# Altium PCB FlightController_Top_6x6.PcbDoc (part 3 of 6)
Units mm, origin at the board's own origin, x right, y up, seen from the top; angles counter-clockwise.
Board outline 149.8 x 149.8 mm, 2 copper layers (Top Layer, Bottom Layer); 156 components, 166 nets, 860 pads, 423 vias.
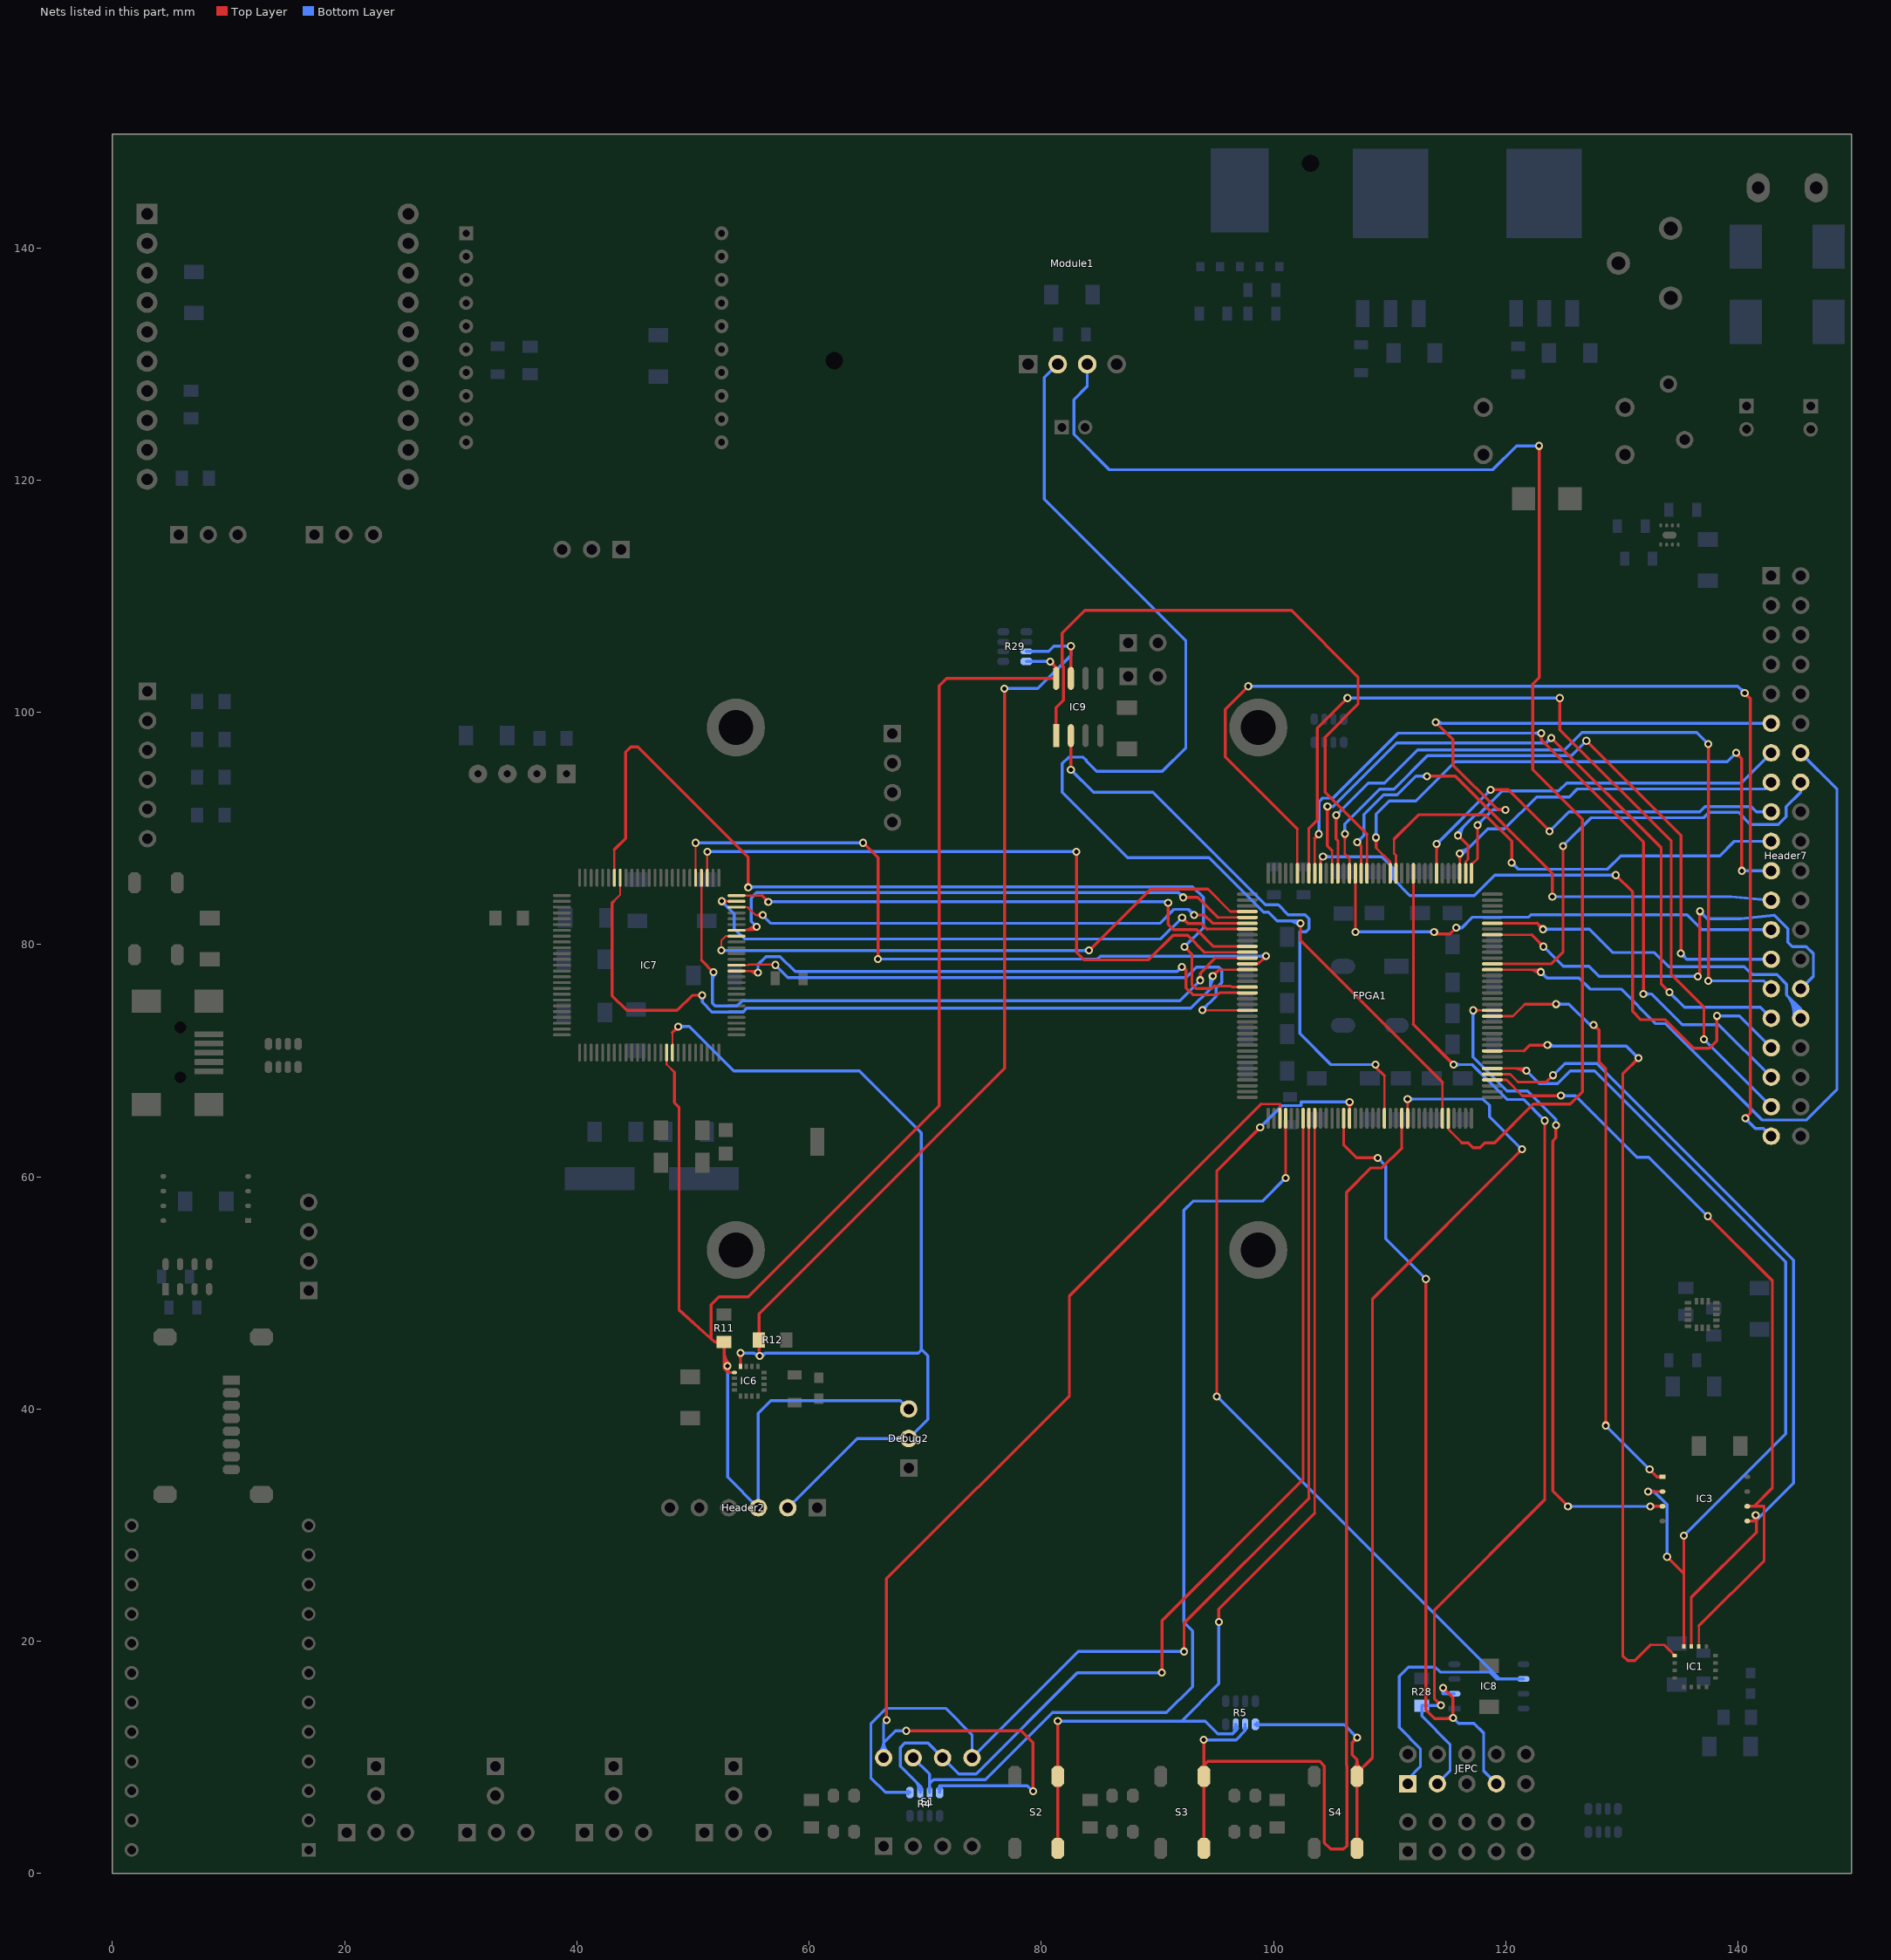
[diagram p3: the nets of this part, all layers, seen from the top]

## Via types
v1: diameter 0.686, hole 0.381, Top Layer to Bottom Layer, 391 vias
v2: diameter 1.27, hole 0.711, Top Layer to Bottom Layer, 32 vias

## Nets (pads, with @x,y where several pads share a name; then routed paths per layer and width w, separated by ;. In a path a pad name is that pad's centre, name@x,y a point inside that pad or via, vN(x,y) a via of type N, cw(c..) or ccw(c..) an arc to the next point about the centre after c; other vN are vias at no path point) (continued)
BLED_ORANGE3: FPGA1.65 Header7.30 | length 42.1
  Top Layer w0.21: FPGA1.65@118.852,80.844 122.245,80.844
  Top Layer w0.254: 122.245,80.844 v1(123.262,79.828) ; v1@123.046,79.828 ccw(c122.524,79.828) 122.893,80.196 ccw(c123.262,80.565) v1@123.262,80.044 ; v1(136.546,77.262) 136.724,77.44 v1(136.724,82.876)
  Bottom Layer w0.254: v1(123.262,79.828) 124.951,78.139 127.173,78.139 128.05,77.262 v1(136.546,77.262) ; v1@136.724,82.66 cw(c136.724,82.138) 137.092,82.507 cw(c137.461,82.876) v1@136.94,82.876 ; v1(136.724,82.876) 137.359,82.241 140.254,82.241 143.15,82.545 144.318,81.377 144.318,80.209 144.699,79.828 145.893,79.828 146.503,79.218 146.503,77.288 Header7.30@145.415,76.2
BLED_ORANGE4: FPGA1.67 Header7.32 | length 39.4
  Top Layer w0.21: FPGA1.67@118.852,81.844 122.693,81.844
  Top Layer w0.254: 122.693,81.844 v1(123.211,81.326) ; v1@122.995,81.326 ccw(c122.473,81.326) 122.842,81.695 ccw(c123.211,82.064) v1@123.211,81.542
  Bottom Layer w0.254: v1(123.211,81.326) 127.228,81.326 129.235,79.32 132.812,79.32 134.036,78.096 140.564,78.096 141.245,77.415 143.353,77.415 144.188,76.58 144.188,75.676 ; v1@123.364,81.173 cw(c123.732,80.805) 123.732,81.326 cw(c123.732,81.848) v1@123.364,81.479 ; 144.537,75.327 cw(c143.234,74.024) Header7.32@145.051,73.721 ; Header7.32@144.801,73.763 ccw(c142.636,74.124) 144.188,75.676 ; 144.886,74.978 cw(c143.832,73.925) Header7.32@145.302,73.679 ; 145.234,74.629 cw(c144.43,73.825) Header7.32@145.552,73.637 ; Header7.32@145.271,74.266 ccw(c145.227,74.449) 145.415,74.449 ; Header7.32@145.415,73.66 145.415,74.449 ; Header7.32@145.559,74.266 cw(c145.603,74.449) 145.415,74.449 ; 144.188,75.676 145.415,74.449
BULTRASONIC_EDGE: FPGA1.60 Header7.16 | length 40.3
  Top Layer w0.21: FPGA1.60@118.852,78.344 120.188,78.344 120.199,78.354 123.947,78.354
  Top Layer w0.254: 123.947,78.354 124.938,79.345 v1(124.938,88.489)
  Bottom Layer w0.254: v1(124.938,88.489) 127.376,90.927 137.063,90.927 137.524,91.388 140.048,91.388 141.092,90.343 143.48,90.343 144.166,91.029 144.166,91.888 145.415,93.137 Header7.16@145.415,93.98
BULTRASONIC_TRIGGER: FPGA1.59 Header7.14 | length 68.8
  Top Layer w0.21: FPGA1.59@118.852,77.844 v1@122.83,77.844 ; 121.975,77.844 cw(c121.975,76.592) v1@122.86,77.477 ; 122.482,77.844 cw(c122.482,77.099) v1@123.008,77.626
  Top Layer w0.254: v1@122.83,77.844 v1(123.028,77.646)
  Bottom Layer w0.254: v1@123.028,77.43 cw(c123.028,76.908) 123.397,77.277 cw(c123.766,77.646) v1@123.244,77.646 ; v1(123.028,77.646) 123.551,77.123 126.319,77.123 127.271,76.17 129.942,76.17 132.915,73.196 133.804,73.196 142.108,64.892 145.893,64.892 148.535,67.534 148.535,93.4 Header7.14@145.415,96.52
CAMERA_DCLK: FPGA1.92 Header7.23 | length 49.8
  Top Layer w0.21: FPGA1.92@107.552,86.144 107.552,88.476
  Top Layer w0.254: v1(107.209,88.819) 107.552,88.476 ; v1@107.22,88.603 cw(c107.243,88.167) 107.552,88.476 ; v1@107.425,88.808 ccw(c107.861,88.785) 107.552,88.476 ; v1(113.229,94.509) 115.663,94.509 124.024,86.148 v1(124.024,84.133)
  Bottom Layer w0.254: v1(107.209,88.819) 107.782,89.393 107.782,91.196 109.477,92.891 110.663,92.891 112.281,94.509 v1(113.229,94.509) ; v1@107.209,89.035 ccw(c107.209,89.557) 107.578,89.188 ccw(c107.946,88.819) v1@107.425,88.819 ; v1@113.076,94.356 ccw(c112.707,93.987) 112.707,94.509 ccw(c112.707,95.03) v1@113.076,94.662 ; v1(124.024,84.133) 139.434,84.133 Header7.23@142.875,83.82
CAMERA_DOUT0: FPGA1.93 Header7.25 | length 42.9
  Top Layer w0.21: v1(107.052,81.098) FPGA1.93@107.052,86.144
  Top Layer w0.254: v1(113.838,81.098) 114.016,80.92 115.21,80.92 v1(115.743,81.453)
  Bottom Layer w0.254: v1(107.052,81.098) v1(113.838,81.098) ; v1(115.743,81.453) 116.226,81.453 ; v1@115.904,81.309 cw(c116.226,81.022) 116.226,81.453 ; v1@115.904,81.597 ccw(c116.226,81.884) 116.226,81.453 ; Header7.25@142.875,81.28 136.89,81.28 135.612,82.558 122.171,82.558 121.979,82.366 117.139,82.366 116.226,81.453
CAMERA_DOUT1: FPGA1.94 Header7.27 | length 59.6
  Top Layer w0.21: v1@105.98,89.381 cw(c105.573,88.975) 106.148,88.975 cw(c106.723,88.975) v1@106.316,89.381 ; v1(106.148,89.549) 106.148,87.806 106.552,87.402 FPGA1.94@106.552,86.144
  Top Layer w0.254: v1(126.952,97.557) 135.098,89.411 v1(135.098,79.243)
  Bottom Layer w0.254: v1(106.148,89.549) 106.148,90.4 109.147,93.399 110.383,93.399 113.259,96.274 125.669,96.274 v1(126.952,97.557) ; v1@135.098,79.027 cw(c135.098,78.506) 135.467,78.875 cw(c135.835,79.243) v1@135.314,79.243 ; v1(135.098,79.243) 135.601,78.74 Header7.27@142.875,78.74
CAMERA_DOUT2: FPGA1.96 Header7.29 | length 68.2
  Top Layer w0.21: FPGA1.96@105.552,86.144 105.552,88.955
  Top Layer w0.254: v1@105.25,90.988 cw(c104.881,90.619) 105.403,90.619 cw(c105.924,90.619) v1@105.555,90.988 ; v1(105.403,91.14) 105.403,89.104 105.552,88.955 ; v1(137.46,76.881) v1(137.46,97.265)
  Bottom Layer w0.254: v1(105.403,91.14) 108.178,93.916 109.55,93.916 112.416,96.782 125.09,96.782 126.589,98.281 136.444,98.281 v1(137.46,97.265) ; v1@105.403,91.356 ccw(c105.403,91.878) 105.771,91.509 ccw(c106.14,91.14) v1@105.619,91.14 ; v1(137.46,76.881) 142.194,76.881 Header7.29@142.875,76.2
CAMERA_DOUT3: FPGA1.97 Header7.31 | length 65.9
  Top Layer w0.21: FPGA1.97@105.052,86.144 105.052,88.108
  Top Layer w0.254: v1@104.491,91.74 cw(c104.122,91.371) 104.643,91.371 cw(c105.165,91.371) v1@104.796,91.74 ; v1(104.643,91.893) 104.643,88.517 105.052,88.108 ; v1(123.922,97.811) 133.396,88.337 133.396,76.602 v1(134.107,75.891)
  Bottom Layer w0.254: v1(104.643,91.893) 105.133,91.893 ; v1@104.803,91.747 cw(c105.133,91.445) 105.133,91.893 ; v1@104.803,92.038 ccw(c105.133,92.34) 105.133,91.893 ; v1@123.706,97.811 cw(c123.185,97.811) 123.553,97.442 cw(c123.922,97.073) v1@123.922,97.595 ; v1(123.922,97.811) 123.49,97.379 110.62,97.379 105.133,91.893 ; v1(134.107,75.891) 135.403,74.595 141.94,74.595 Header7.31@142.875,73.66
CAMERA_DOUT4: FPGA1.99 Header7.33 | length 60.1
  Top Layer w0.21: FPGA1.99@104.052,86.144 104.052,87.364 v1(104.262,87.575)
  Top Layer w0.254: v1(129.485,85.987) 130.925,84.546 130.925,74.265 131.657,73.534 133.748,73.534 136.191,71.09 137.562,71.09 138.197,71.725 v1(138.197,73.859)
  Bottom Layer w0.254: v1(104.262,87.575) 109.317,87.575 110.333,86.559 110.333,85.644 111.755,84.222 117.293,84.222 119.058,85.987 v1(129.485,85.987) ; v1@104.415,87.422 cw(c104.784,87.053) 104.784,87.575 cw(c104.784,88.096) v1@104.415,87.727 ; v1@129.332,85.834 ccw(c128.963,85.466) 128.963,85.987 ccw(c128.963,86.509) v1@129.332,86.14 ; v1(138.197,73.859) 140.136,73.859 Header7.33@142.875,71.12
CAMERA_DOUT5: FPGA1.100 Header7.35 | length 71.3
  Top Layer w0.21: FPGA1.100@103.552,86.144 103.552,89.15
  Top Layer w0.254: v1@103.703,89.517 cw(c103.186,89.516) 103.552,89.15 ; v1@103.919,89.302 ccw(c103.918,88.785) 103.552,89.15 ; v1(103.919,89.518) 103.552,89.15 ; v1@122.916,98.064 cw(c122.547,97.696) 123.068,97.696 cw(c123.59,97.696) v1@123.221,98.064 ; v1(123.068,98.217) 123.068,97.633 131.86,88.842 v1(131.86,75.754)
  Bottom Layer w0.254: v1(103.919,89.518) 103.919,92.301 104.237,92.618 105.141,92.618 110.739,98.217 v1(123.068,98.217) ; v1@122.916,98.064 ccw(c122.547,97.696) 122.547,98.217 ccw(c122.547,98.739) v1@122.916,98.37 ; v1(131.86,75.754) 132.566,75.754 135.207,73.112 138.343,73.112 Header7.35@142.875,68.58 ; v1@132.012,75.601 cw(c132.381,75.232) 132.381,75.754 cw(c132.381,76.275) v1@132.012,75.907
CAMERA_DOUT6: FPGA1.101 Header7.37 | length 77.5
  Top Layer w0.21: FPGA1.101@103.052,86.144 103.052,89.996
  Top Layer w0.254: 103.052,89.996 103.784,90.728 103.784,98.653 v1(106.371,101.24) ; v1(124.659,101.24) 124.659,98.509 134.26,88.908 134.26,77.44 137.079,74.621 v1(137.079,71.836)
  Bottom Layer w0.254: v1(106.371,101.24) v1(124.659,101.24) ; v1(137.079,71.836) Header7.37@142.875,66.04
CAMERA_DOUT7: FPGA1.103 Header7.39 | length 105.7
  Top Layer w0.21: FPGA1.103@102.052,86.144 102.052,89.962
  Top Layer w0.254: v1(97.836,102.256) 95.855,100.275 95.855,96.159 102.052,89.962 ; v1@140.589,101.451 cw(c140.589,100.93) 140.958,101.298 cw(c141.326,101.667) v1@140.805,101.667 ; v1(140.589,101.667) 141.067,101.189 141.067,65.477 v1(140.635,65.045) ; v1@140.635,65.261 ccw(c140.635,65.782) 141.004,65.414 ccw(c141.373,65.045) v1@140.851,65.045
  Bottom Layer w0.254: v1(97.836,102.256) 140,102.256 v1(140.589,101.667) ; v1@140.373,101.667 ccw(c139.852,101.667) 140.22,102.036 ccw(c140.589,102.404) v1@140.589,101.883 ; v1@140.635,64.829 cw(c140.635,64.307) 141.004,64.676 cw(c141.373,65.045) v1@140.851,65.045 ; v1(140.635,65.045) 141.508,64.172 142.203,64.172 Header7.39@142.875,63.5
CAMERA_EXTCLK: FPGA1.79 Header7.17 | length 38.4
  Top Layer w0.21: v1@113.884,88.507 cw(c113.477,88.101) 114.052,88.101 cw(c114.627,88.101) v1@114.22,88.507 ; FPGA1.79@114.052,86.144 v1(114.052,88.675)
  Top Layer w0.254: v1(118.716,93.339) 120.217,93.339 v1(123.784,89.773)
  Bottom Layer w0.254: v1(114.052,88.675) v1(118.716,93.339) ; v1@114.052,88.891 ccw(c114.052,89.413) 114.421,89.044 ccw(c114.789,88.675) v1@114.268,88.675 ; v1@118.5,93.339 cw(c117.979,93.339) 118.347,92.971 cw(c118.716,92.602) v1@118.716,93.123 ; v1(123.784,89.773) 125.451,91.44 136.706,91.44 137.162,91.896 141.138,91.896 141.594,91.44 Header7.17@142.875,91.44
CAMERA_HD: FPGA1.86 Header7.19 | length 41.2
  Top Layer w0.21: 110.388,89.088 110.388,87.848 110.552,87.684 FPGA1.86@110.552,86.144
  Top Layer w0.254: 110.388,89.088 112.489,91.188 118.248,91.188 120.518,88.918 v1(120.518,87.067)
  Bottom Layer w0.254: v1@120.518,86.851 cw(c120.518,86.329) 120.887,86.698 cw(c121.256,87.067) v1@120.734,87.067 ; v1(120.518,87.067) 121.09,86.495 128.748,86.495 129.904,87.651 138.451,87.651 139.7,88.9 Header7.19@142.875,88.9
CAMERA_RESET: FPGA1.75 Header7.15 | length 33.5
  Top Layer w0.21: v1@115.884,87.692 cw(c115.477,87.285) 116.052,87.285 cw(c116.627,87.285) v1@116.22,87.692 ; FPGA1.75@116.052,86.144 v1(116.052,87.86)
  Bottom Layer w0.254: v1@116.052,87.822 ccw(c116.052,88.464) 116.506,88.01 ; v1(116.052,87.86) 116.356,87.86 118.457,89.961 119.898,89.961 122.655,92.718 125.484,92.718 126.175,93.409 142.304,93.409 Header7.15@142.875,93.98 ; v1@116.052,88.076 ccw(c116.052,89.332) 116.94,88.444
CAMERA_SCL: FPGA1.73 Header7.11 | length 49
  Top Layer w0.21: FPGA1.73@117.052,86.144 117.052,86.889 117.572,87.409 v1(117.572,90.292)
  Top Layer w0.254: v1(113.965,99.157) 115.464,97.658 115.464,95.47 119.321,91.613 v1(119.985,91.613) ; v1@119.832,91.46 ccw(c119.464,91.092) 119.464,91.613 ccw(c119.464,92.135) v1@119.832,91.766
  Bottom Layer w0.254: v1(113.965,99.157) 114.062,99.06 Header7.11@142.875,99.06 ; v1@114.118,99.31 ccw(c114.721,99.913) 114.721,99.06 ; v1(117.572,90.292) 118.893,91.613 v1(119.985,91.613) ; v1@117.572,90.508 ccw(c117.572,91.03) 117.941,90.661 ccw(c118.309,90.292) v1@117.788,90.292
CAMERA_SDA: FPGA1.74 Header7.13 | length 35.2
  Top Layer w0.21: FPGA1.74@116.552,86.144 116.552,87.139 116.759,87.346 116.759,88.54
  Top Layer w0.254: v1(115.896,89.403) 116.759,88.54
  Bottom Layer w0.254: v1@115.858,89.403 cw(c116.472,89.403) 116.038,89.838 ; v1(115.896,89.403) 115.896,89.696 117.363,91.164 117.656,91.164 119.718,93.226 124.557,93.226 125.248,93.917 140.272,93.917 Header7.13@142.875,96.52 ; v1@116.112,89.403 cw(c117.34,89.403) 116.471,90.272
CAMERA_VD: FPGA1.87 Header7.21 | length 55.5
  Top Layer w0.21: 108.834,88.348 110.052,87.13 FPGA1.87@110.052,86.144 ; 109.808,87.374 cw(c109.327,86.894) FPGA1.87@110.007,86.894
  Top Layer w0.254: v1@108.682,89.071 cw(c108.313,88.702) 108.834,88.702 cw(c109.356,88.702) v1@108.987,89.071 ; 108.834,88.348 v1(108.834,89.224) ; v1@139.843,96.304 cw(c139.843,95.783) 140.212,96.151 cw(c140.581,96.52) v1@140.059,96.52 ; v1(139.843,96.52) 140.33,96.033 v1(140.33,86.36) ; v1@140.178,86.513 ccw(c139.809,86.881) 140.33,86.881 ccw(c140.852,86.881) v1@140.483,86.513
  Bottom Layer w0.254: v1@108.682,89.377 ccw(c108.313,89.745) 108.834,89.745 ccw(c109.356,89.745) v1@108.987,89.377 ; v1(108.834,89.224) 108.834,91.248 109.969,92.383 112.271,92.383 115.654,95.766 139.089,95.766 v1(139.843,96.52) ; v1(140.33,86.36) Header7.21@142.875,86.36
CLOCK_SYNTH_0: FPGA1.21 IC9.2 | length 51.8
  Top Layer w0.21: FPGA1.21@109.552,65.044 109.552,68.702
  Top Layer w0.254: v1(82.55,95.06) IC9.2@82.55,98.004 ; v1(108.784,69.668) 108.784,69.471 109.552,68.702
  Bottom Layer w0.254: v1(82.55,95.06) 84.498,93.112 89.607,93.112 99.298,83.42 100.414,83.42 101.268,82.566 102.713,82.566 103.056,82.223 103.056,81.377 102.789,81.11 102.268,81.11 102.268,72.347 104.948,69.668 v1(108.784,69.668)
CLOCK_SYNTH_1: FPGA1.91 IC9.1 | length 57.4
  Top Layer w0.21: FPGA1.91@108.052,86.144 108.052,89.518
  Top Layer w0.254: IC9.1@81.28,98.004 81.28,100.406 81.91,101.037 81.91,103.958 81.809,104.059 81.809,106.853 83.739,108.784 101.545,108.784 107.285,103.043 107.285,100.706 104.451,97.872 104.451,93.119 108.052,89.518
CONF_DONE: FPGA1.83 JEPC.3 R28.2 | length 95.4
  Top Layer w0.21: 112.052,73.13 FPGA1.83@112.052,86.144
  Top Layer w0.254: 112.052,73.13 v1(115.515,69.668) ; v1@114.211,14.478 ccw(c113.69,14.478) 114.058,14.847 ccw(c114.427,15.215) v1@114.427,14.694 ; v1(114.427,14.478) 113.864,15.041 113.864,22.703 123.363,32.203 v1(123.363,64.842)
  Bottom Layer w0.254: R28.2@112.776,14.446 112.776,13.554 115.21,11.121 115.21,8.826 JEPC.3@114.119,7.734 ; v1(115.515,69.668) 117.115,69.668 120.117,66.665 121.54,66.665 v1(123.363,64.842) ; v1@115.667,69.515 cw(c116.036,69.146) 116.036,69.668 cw(c116.036,70.189) v1@115.667,69.82 ; R28.2@112.776,14.478 v1(114.427,14.478) R28.2@112.776,14.478
CONFSWITCH_1: FPGA1.3 R4.4 S1.8 | length 110.5
  Top Layer w0.21: 98.928,66.264 100.552,66.264 FPGA1.3@100.552,65.044
  Top Layer w0.254: v1(66.675,13.208) 66.675,25.4 82.423,41.148 82.423,49.759 98.928,66.264 ; v1(68.372,12.289) 78.278,12.289 79.294,11.273 v1(79.294,7.082)
  Bottom Layer w0.254: S1.8@66.03,10.454 ccw(c65.369,11.273) 66.421,11.273 ; S1.8@66.189,10.257 ccw(c65.798,10.742) 66.421,10.742 ccw(c67.044,10.742) S1.8@66.653,10.257 ; S1.8@66.421,9.97 66.421,11.273 ; v1(66.675,13.208) 66.421,12.954 66.421,11.273 ; S1.8@66.812,10.454 cw(c67.473,11.273) 66.421,11.273 ; v1(68.372,12.289) 67.437,12.289 66.421,11.273 ; R4.4@71.126,7.297 ccw(c70.904,7.565) 71.252,7.565 ; R4.4@71.252,6.969 71.252,7.565 ; R4.4@71.378,7.297 cw(c71.6,7.565) 71.252,7.565 ; v1(79.294,7.082) 78.812,7.565 ; 71.252,7.565 78.812,7.565 ; 71.252,7.565 78.812,7.565
CONFSWITCH_2: FPGA1.4 R4.3 S1.7 | length 86.6
  Top Layer w0.21: v1(101.052,59.904) FPGA1.4@101.052,65.044
  Bottom Layer w0.254: S1.7@68.961,9.97 70.377,8.553 70.377,7.741 ; R4.3@70.29,7.306 ccw(c70.08,7.516) 70.377,7.516 ccw(c70.674,7.516) R4.3@70.464,7.306 ; R4.3@70.377,6.969 70.377,7.741 ; v1(101.052,59.904) 99.055,57.907 93.061,57.907 92.274,57.12 92.274,21.636 93.036,20.874 93.036,16.099 90.788,13.851 80.983,13.851 75.205,8.073 70.709,8.073 70.377,7.741
CONFSWITCH_3: FPGA1.7 R4.2 S1.6 | length 86.4
  Top Layer w0.21: 102.552,33.931 FPGA1.7@102.552,65.044
  Top Layer w0.254: v1(90.394,17.293) 90.394,21.773 102.552,33.931
  Bottom Layer w0.254: 69.148,7.957 cw(c68.411,7.219) R4.2@69.454,7.219 ; R4.2@69.49,7.306 ccw(c69.28,7.516) 69.577,7.516 ccw(c69.874,7.516) R4.2@69.664,7.306 ; R4.2@69.577,6.969 69.577,7.528 67.864,9.241 67.864,10.841 68.245,11.222 70.248,11.222 S1.6@71.501,9.97 72.89,8.581 74.384,8.581 83.096,17.293 v1(90.394,17.293) ; 69.582,7.523 cw(c69.278,7.219) R4.2@69.708,7.219
CONFSWITCH_4: FPGA1.8 R4.1 S1.5 | length 96.8
  Top Layer w0.21: 103.052,32.313 FPGA1.8@103.052,65.044
  Top Layer w0.254: v1(92.299,19.122) 92.299,21.56 103.052,32.313
  Bottom Layer w0.254: R4.1@68.702,6.969 R4.1@68.702,6.98 ; v1(92.299,19.122) 83.193,19.122 S1.5@74.041,9.97 74.041,11.938 71.755,14.224 66.667,14.224 65.324,12.881 65.324,8.225 66.569,6.98 ; 66.569,6.98 R4.1@68.702,6.98 ; 66.569,6.98 R4.1@68.702,6.98 ; 68.196,6.98 cw(c68.196,6.463) 68.562,6.829 ccw(c68.196,6.463) 68.196,6.98 ; 68.252,6.98 ccw(c68.252,7.419) 68.562,7.109 cw(c68.252,7.419) 68.252,6.98
CONFSWITCH_5: FPGA1.9 R5.3 S2.2 | length 85.5
  Top Layer w0.21: 103.552,31.035 FPGA1.9@103.552,65.044
  Top Layer w0.254: S2.2@81.424,2.159 S2.2@81.424,8.359 v1(81.424,13.127) ; v1(95.296,21.662) 95.296,22.779 103.552,31.035
  Bottom Layer w0.254: v1(81.424,13.127) 92.096,13.127 ; v1(95.296,21.662) 95.296,16.328 92.096,13.127 ; R5.3@96.635,12.564 cw(c96.071,12.426) 96.482,12.016 ; R5.3@96.668,12.506 cw(c96.458,12.296) 96.755,12.296 cw(c97.052,12.296) R5.3@96.842,12.506 ; R5.3@96.755,12.843 96.755,12.289 96.482,12.016 ; 96.801,12.335 ccw(c96.585,12.552) R5.3@96.882,12.624 ; 92.096,13.127 94.109,13.127 95.22,12.016 96.482,12.016
CONFSWITCH_6: FPGA1.24 R5.2 S3.2 | length 100.1
  Top Layer w0.21: 111.052,62.479 FPGA1.24@111.052,65.044
  Top Layer w0.254: S3.2@93.997,2.159 S3.2@93.997,8.359 93.997,9.313 ; v1(93.997,11.508) 93.997,9.313 ; 111.052,62.479 109.339,60.766 108.388,60.766 106.282,58.66 106.282,9.343 106.32,9.304 106.32,2.383 106.04,2.104 104.923,2.104 104.389,2.637 104.389,9.241 103.983,9.647 94.331,9.647 93.997,9.313 ; 93.997,9.313 ccw(c94.217,9.313) 94.142,9.106 cw(c94.217,9.313) 93.997,9.313 ; 93.997,9.313 cw(c93.777,9.313) 93.852,9.106 ccw(c93.777,9.313) 93.997,9.313
  Bottom Layer w0.254: v1(93.997,11.508) 96.774,11.508 97.555,12.289 R5.2@97.555,12.843 ; R5.2@97.468,12.506 cw(c97.258,12.296) 97.555,12.296 cw(c97.852,12.296) R5.2@97.642,12.506
CONFSWITCH_7: FPGA1.25 R5.1 S4.2 | length 105.4
  Top Layer w0.21: v1@111.384,66.528 cw(c110.977,66.121) 111.552,66.121 cw(c112.127,66.121) v1@111.72,66.528 ; FPGA1.25@111.552,65.044 v1(111.552,66.696)
  Top Layer w0.254: 106.816,11.287 ccw(c106.397,11.705) v1@106.989,11.705 ; 106.886,11.357 cw(c107.205,11.037) v1@107.205,11.489 ; S4.2@106.906,9.008 ccw(c106.184,9.73) 107.205,9.73 ccw(c108.226,9.73) S4.2@107.504,9.008 ; S4.2@107.205,2.159 S4.2@107.205,8.359 107.205,8.653 108.53,9.978 108.53,49.496 v1(121.404,62.37) ; S4.2@107.205,9.19 107.205,9.812 106.79,10.228 106.79,11.26 107.205,11.676 v1(107.205,11.705)
  Bottom Layer w0.254: R5.1@98.43,12.843 R5.1@98.43,12.822 ; v1(107.205,11.705) 106.087,12.822 ; v1(111.552,66.696) 118.066,66.696 118.601,66.161 118.601,65.174 v1(121.404,62.37) ; v1@111.705,66.543 cw(c112.073,66.174) 112.073,66.696 cw(c112.073,67.217) v1@111.705,66.849 ; R5.1@98.43,12.822 106.087,12.822 ; R5.1@98.43,12.822 106.087,12.822 ; R5.1@98.57,12.703 cw(c98.858,12.415) 98.858,12.822 ccw(c98.858,12.415) R5.1@98.57,12.703 ; R5.1@98.57,12.983 ccw(c98.958,13.371) 98.958,12.822 cw(c98.958,13.371) R5.1@98.57,12.983
DATAO: FPGA1.14 IC8.2 JEPC.7 | length 71.7
  Top Layer w0.21: 106.052,62.749 FPGA1.14@106.052,65.044
  Top Layer w0.254: 106.052,62.749 107.16,61.641 v1(108.987,61.641) ; v1(113.127,51.202) 113.127,14.092 113.889,13.33 115.388,13.33 v1(115.464,13.407) 115.464,15.134 v1(114.6,15.997) ; 114.758,13.33 ccw(c114.758,14.112) v1@115.311,13.559 ; 115.126,13.33 cw(c115.126,13.069) v1@115.311,13.254
  Bottom Layer w0.254: v1(108.987,61.641) 109.685,60.943 109.685,54.643 v1(113.127,51.202) ; v1@114.449,15.844 cw(c114.092,15.482) 114.6,15.482 ; v1(114.6,15.997) 114.6,15.481 ; v1@114.752,15.844 ccw(c115.108,15.482) 114.6,15.482 ; v1(115.464,13.407) 115.932,12.938 117.273,12.938 118.105,12.105 118.105,8.828 JEPC.7@119.199,7.734 ; IC8.2@115.589,15.481 114.6,15.481
DCLK: FPGA1.15 IC8.6 JEPC.1 | length 92.1
  Top Layer w0.21: v1@106.384,66.274 cw(c105.977,65.867) 106.552,65.867 cw(c107.127,65.867) v1@106.72,66.274 ; FPGA1.15@106.552,65.044 v1(106.552,66.442)
  Top Layer w0.254: v1(95.118,41.093) 95.118,60.524 v1(98.852,64.257)
  Bottom Layer w0.254: v1(95.118,41.093) 119.46,16.751 ; v1(98.852,64.257) 100.732,66.137 102.383,66.137 102.383,66.442 v1(106.552,66.442) ; JEPC.1@111.579,7.734 111.579,8.113 112.656,9.19 112.656,10.765 110.841,12.58 110.841,16.988 111.633,17.78 113.919,17.78 114.355,17.344 118.631,17.344 119.223,16.751 119.46,16.751 ; IC8.6@121.539,16.751 119.46,16.751
DS1085_SCL: Debug2.3 Header2.3 IC6.1 IC7.66 IC9.8 R11.1 R29.8 | length 154.4
  Top Layer w0.17: 47.729,69.693 IC7.66@47.729,70.707
  Top Layer w0.175: 47.729,69.693 48.395,69.027
  Top Layer w0.21: 53.031,43.15 IC6.1@53.564,43.15
  Top Layer w0.254: 48.395,69.027 48.395,66.397 48.796,65.996 48.796,48.555 51.843,45.785 ; R11.1@52.21,45.579 ccw(c51.843,45.357) 51.843,45.785 ; R11.1@52.21,45.991 cw(c51.843,46.213) 51.843,45.785 ; v1@52.842,43.543 cw(c52.508,43.142) 53.027,43.189 cw(c53.546,43.237) v1@53.146,43.571 ; v1(52.98,43.709) 53.031,43.15 52.726,43.455 52.675,43.506 52.675,43.709 R11.1@52.675,45.785 51.843,45.785 ; v1@80.767,104.173 cw(c80.767,103.652) 81.136,104.021 cw(c81.505,104.389) v1@80.983,104.389 ; v1(80.767,104.389) 81.28,103.877 IC9.8@81.28,102.942 ; IC9.8@81.28,102.934 IC9.8@81.28,102.942 ; 51.843,45.785 51.557,46.071 51.557,48.993 52.221,49.657 54.762,49.657 71.217,66.112 71.217,102.307 71.852,102.942 IC9.8@81.28,102.942 ; 52.675,44.353 ccw(c53.624,44.353) 52.953,43.682 cw(c53.624,44.353) 52.675,44.353 ; 52.675,44.966 ccw(c54.237,44.966) 53.133,43.862 cw(c54.237,44.966) 52.675,44.966 ; 80.929,102.942 cw(c80.929,102.583) 81.182,102.836 ccw(c80.929,102.583) 80.929,102.942 ; 80.965,102.942 ccw(c80.965,103.249) 81.182,103.032 cw(c80.965,103.249) 80.965,102.942
  Bottom Layer w0.254: v1(52.98,43.709) 52.98,34.142 Header2.3@55.626,31.496 55.626,39.649 56.714,40.737 67.848,40.737 Debug2.3@68.58,40.005 ; R29.8@78.724,104.389 v1(80.767,104.389)
DS1085_SDA: Debug2.2 Header2.2 IC6.16 IC7.67 IC9.7 R12.1 R29.7 | length 169.5
  Top Layer w0.17: IC7.67@48.229,70.707 48.229,72.436
  Top Layer w0.21: v1@53.921,44.658 cw(c53.514,44.252) 54.089,44.252 cw(c54.664,44.252) v1@54.257,44.658 ; IC6.16@54.089,43.675 v1(54.089,44.826)
  Top Layer w0.254: 48.229,72.436 v1(48.738,72.944) ; v1@48.522,72.944 cw(c48.001,72.944) 48.369,72.575 cw(c48.738,72.207) v1@48.738,72.728 ; v1(55.753,44.577) 55.753,44.771 55.691,44.833 R12.1@55.691,45.944 55.691,48.198 76.83,69.337 v1(76.83,102.053) ; v1@82.397,105.557 cw(c82.029,105.189) 82.55,105.189 cw(c83.071,105.189) v1@82.703,105.557 ; IC9.7@82.55,102.934 v1(82.55,105.71)
  Bottom Layer w0.254: v1(48.738,72.944) 49.699,72.944 53.516,69.128 64.34,69.128 69.668,63.8 69.668,45.08 ; v1@48.891,72.791 cw(c49.259,72.423) 49.259,72.944 cw(c49.259,73.466) v1@48.891,73.097 ; v1(54.089,44.826) 55.25,44.826 ; v1@55.651,44.767 cw(c55.49,45.067) 55.25,44.826 ; v1(55.753,44.577) 55.499,44.577 55.25,44.826 ; v1@55.753,44.771 55.977,44.547 56.261,44.831 ; v1@55.853,44.768 ccw(c56.014,45.078) 56.261,44.831 ; Header2.2@58.166,31.496 64.135,37.465 Debug2.2@68.58,37.465 70.231,39.116 70.231,44.577 69.698,45.11 69.668,45.08 ; v1(76.83,102.053) 79.701,102.053 82.55,104.902 v1(82.55,105.71) 81.072,105.71 80.626,105.264 R29.7@78.724,105.264 ; 56.261,44.831 69.418,44.831 69.668,45.08
FPGA_A-/D: FPGA1.122 IC7.18 | length 72.2
  Top Layer w0.17: 43.729,84.293 IC7.18@43.729,85.756
  Top Layer w0.175: 43.175,83.739 43.729,84.293
  Top Layer w0.21: 95.319,77.844 FPGA1.122@97.752,77.844
  Top Layer w0.254: 43.175,83.739 43.04,83.604 43.04,75.594 44.293,74.341 48.636,74.341 49.932,75.637 v1(50.795,75.637) ; v1(94.763,77.288) 95.319,77.844 ; v1@94.763,77.504 ccw(c94.763,78.025) 95.132,77.656 ccw(c95.5,77.288) v1@94.979,77.288
  Bottom Layer w0.254: v1@50.643,75.484 cw(c50.274,75.115) 50.795,75.115 cw(c51.317,75.115) v1@50.948,75.484 ; v1(50.795,75.637) 50.795,75.05 51.644,74.201 54.305,74.201 54.623,74.519 92.884,74.519 94.56,76.195 94.56,77.084 v1(94.763,77.288) ; 94.56,76.276 cw(c95.775,76.276) v1@94.916,77.135 ; 94.56,76.889 cw(c95.162,76.889) v1@94.736,77.314
FPGA_D0: FPGA1.112 IC7.93 | length 51.5
  Top Layer w0.17: 52.817,80.731 IC7.93@53.754,80.731
  Top Layer w0.175: v1(52.446,79.497) 52.446,80.361 52.817,80.731
  Top Layer w0.21: 94.344,84.793 96.293,82.844 FPGA1.112@97.752,82.844
  Top Layer w0.254: v1(84.12,79.497) 89.416,84.793 94.344,84.793
  Bottom Layer w0.254: v1(52.446,79.497) v1(84.12,79.497) ; v1@83.967,79.345 ccw(c83.599,78.976) 83.599,79.497 ccw(c83.599,80.019) v1@83.967,79.65
FPGA_D1: FPGA1.113 IC7.94 | length 52.8
  Top Layer w0.17: IC7.94@53.754,81.232 55.197,81.232 ; IC7.94@54.146,81.232 ccw(c54.146,82.887) v1@55.317,81.716 ; 54.556,81.232 ccw(c54.556,82.477) v1@55.437,81.596 ; 54.967,81.232 ccw(c54.967,82.066) v1@55.557,81.476
  Top Layer w0.175: v1@55.254,81.461 cw(c55.034,81.394) 55.197,81.232 ; v1@55.426,81.289 ccw(c55.359,81.069) 55.197,81.232 ; v1(55.499,81.534) 55.197,81.232
  Top Layer w0.21: 95.219,82.344 FPGA1.113@97.752,82.344
  Top Layer w0.254: v1(92.223,84.069) 93.493,84.069 95.219,82.344
  Bottom Layer w0.254: v1@55.314,81.534 v1(55.499,81.534) 55.012,82.021 55.012,84.011 55.477,84.476 91.816,84.476 v1(92.223,84.069) ; v1@92.007,84.069 ccw(c91.485,84.069) 91.854,84.438 ccw(c92.223,84.807) v1@92.223,84.285
FPGA_D2: FPGA1.114 IC7.98 | length 46.9
  Top Layer w0.17: IC7.98@54.229,83.232 54.707,83.232
  Top Layer w0.175: 54.707,83.232 55.388,82.55 v1(56.007,82.55) ; v1@55.826,82.369 ccw(c55.39,81.933) 55.39,82.55 ccw(c55.39,83.167) v1@55.826,82.731
  Top Layer w0.21: 94.747,81.844 FPGA1.114@97.752,81.844
  Top Layer w0.254: v1(93.168,82.547) 94.043,82.547 94.747,81.844
  Bottom Layer w0.254: v1(56.007,82.55) 56.723,81.834 90.226,81.834 91.432,83.041 92.675,83.041 v1(93.168,82.547) ; v1@92.952,82.547 ccw(c92.431,82.547) 92.8,82.916 ccw(c93.168,83.285) v1@93.168,82.763
FPGA_D3: FPGA1.115 IC7.99 | length 51.6
  Top Layer w0.17: v1@52.48,83.731 IC7.99@53.754,83.731 ; v1@52.654,83.557 cw(c53.076,83.135) IC7.99@53.076,83.731 ; v1@52.654,83.922 ccw(c53.113,84.381) IC7.99@53.113,83.731
  Top Layer w0.175: v1(52.472,83.739) v1@52.48,83.731
  Top Layer w0.21: 94.257,81.344 FPGA1.115@97.752,81.344
  Top Layer w0.254: v1@92.129,82.101 cw(c92.129,81.579) 92.498,81.948 cw(c92.866,82.317) v1@92.345,82.317 ; v1(92.129,82.317) 92.637,81.809 93.792,81.809 94.257,81.344
  Bottom Layer w0.254: v1(52.472,83.739) 53.564,82.647 53.564,81.377 54.453,80.488 90.3,80.488 v1(92.129,82.317)
FPGA_D4: FPGA1.118 IC7.100 | length 46.4
  Top Layer w0.17: IC7.100@54.229,84.232 55.942,84.232
  Top Layer w0.21: 94.846,79.844 FPGA1.118@97.752,79.844
  Top Layer w0.254: 55.942,84.232 v1(56.485,83.688) ; v1(90.927,83.612) 90.927,81.758 91.384,81.301 93.389,81.301 94.846,79.844
  Bottom Layer w0.254: v1(56.485,83.688) 90.851,83.688 v1(90.927,83.612)
FPGA_D5: FPGA1.119 IC7.3 | length 59.2
  Top Layer w0.17: IC7.3@51.229,85.756 v1(51.229,88.006)
  Top Layer w0.21: 94.053,79.344 FPGA1.119@97.752,79.344
  Top Layer w0.254: v1(83.028,88.006) 83.028,79.345 83.688,78.685 89.251,78.685 91.359,80.793 92.604,80.793 94.053,79.344
  Bottom Layer w0.254: v1(51.229,88.006) v1(83.028,88.006)
FPGA_D6: FPGA1.120 IC7.4 | length 61
  Top Layer w0.17: 50.729,78.649 IC7.4@50.729,85.756
  Top Layer w0.21: 94.991,78.844 FPGA1.120@97.752,78.844
  Top Layer w0.254: 50.729,78.649 v1(51.761,77.618) ; v1@93.543,77.085 ccw(c93.175,77.453) 93.696,77.453 ccw(c94.217,77.453) v1@93.849,77.085 ; v1(93.696,76.932) 93.696,77.549 94.991,78.844
  Bottom Layer w0.254: 51.659,76.851 cw(c52.527,76.851) v1@51.913,77.465 ; v1(51.761,77.618) 51.659,77.516 51.659,74.963 51.913,74.709 53.78,74.709 54.25,75.179 91.943,75.179 v1(93.696,76.932)
FPGA_D7: FPGA1.121 IC7.5 | length 65.6
  Top Layer w0.17: IC7.5@50.229,85.756 v1(50.229,88.768)
  Top Layer w0.21: FPGA1.121@97.752,78.344 98.689,78.344 v1(99.36,79.015) ; FPGA1.121@98.502,78.389 ccw(c98.502,78.95) 98.899,78.553 ; v1@99.122,79.015 cw(c98.548,79.015) 98.954,78.609 cw(c99.36,78.202) v1@99.36,78.777
  Top Layer w0.254: v1(64.664,88.768) 65.934,87.498 v1(65.934,78.761)
  Bottom Layer w0.254: v1(50.229,88.768) v1(64.664,88.768) ; v1(65.934,78.761) 84.857,78.761 85.111,79.015 v1(99.36,79.015) ; v1@99.207,78.862 ccw(c98.839,78.493) 98.839,79.015 ccw(c98.839,79.536) v1@99.207,79.168
FPGA_OK-IN: FPGA1.129 IC7.88 | length 51.6
  Top Layer w0.17: IC7.88@53.754,78.232 54.762,78.232
  Top Layer w0.175: 54.762,78.232 54.809,78.278 v1@57.069,78.278
  Top Layer w0.21: v1@93.896,74.344 FPGA1.129@97.752,74.344
  Top Layer w0.254: v1@57.069,78.278 v1(57.095,78.253) ; v1(93.874,74.367) v1@93.896,74.344
  Bottom Layer w0.254: v1(57.095,78.253) 58.187,77.161 92.464,77.161 93.378,78.075 95.296,78.075 95.55,77.821 95.55,76.729 95.068,76.246 95.068,75.56 v1(93.874,74.367) ; v1@93.874,74.583 ccw(c93.874,75.104) 94.243,74.735 ccw(c94.611,74.367) v1@94.09,74.367
FPGA_OK-OUT: FPGA1.126 IC7.87 | length 50.6
  Top Layer w0.17: IC7.87@53.754,77.731 v1@55.457,77.731 ; 54.637,77.731 cw(c54.637,76.634) v1@55.414,77.41 ; 55.048,77.731 cw(c55.048,77.044) v1@55.534,77.53
  Top Layer w0.21: 95.37,75.861 97.117,75.861 97.135,75.844 FPGA1.126@97.752,75.844 ; 96.851,75.861 cw(c96.851,75.693) FPGA1.126@96.97,75.812
  Top Layer w0.254: v1@55.457,77.731 v1(55.596,77.592) ; v1(92.109,78.088) 92.197,78.088 92.464,77.821 ; v1@92.182,77.884 cw(c92.273,77.63) 92.464,77.821 ; v1@92.325,78.088 ccw(c92.632,78.088) 92.415,77.87 ; 95.37,75.861 95.189,75.68 93.061,75.68 92.464,76.277 92.464,77.821
  Bottom Layer w0.254: v1(55.596,77.592) 55.596,78.27 56.303,78.977 57.499,78.977 58.799,77.677 91.698,77.677 v1(92.109,78.088) ; v1@91.893,78.088 cw(c91.371,78.088) 91.74,77.719 cw(c92.109,77.35) v1@92.109,77.872
FPGA_R-/W: FPGA1.125 IC7.19 | length 82.4
  Top Layer w0.17: IC7.19@43.229,85.756 43.229,88.187
  Top Layer w0.21: 94.906,76.433 96.328,76.433 96.418,76.344 FPGA1.125@97.752,76.344
  Top Layer w0.254: 43.229,88.187 44.196,89.154 44.196,96.576 44.646,97.026 45.253,97.026 54.767,87.512 54.758,87.503 v1(54.758,84.933) ; v1(92.337,79.815) 92.972,79.18 92.972,76.551 93.315,76.208 94.681,76.208 94.906,76.433
  Bottom Layer w0.254: v1(54.758,84.933) 54.809,84.984 93.046,84.984 93.963,84.067 93.963,81.44 v1(92.337,79.815) ; v1@54.911,84.78 cw(c55.402,84.289) 55.402,84.984 ; v1@54.911,85.086 ccw(c55.157,85.332) 55.157,84.984
FPGA_SPI_/GYROCS: FPGA1.45 IC1.5 | length 71.9
  Top Layer w0.21: FPGA1.45@118.852,70.844 121.581,70.844 ; 132.461,19.685 133.66,19.685 IC1.5@134.562,18.783 ; 134.4,18.945 cw(c134.238,18.783) IC1.5@134.467,18.783
  Top Layer w0.254: 121.581,70.844 122.079,71.343 123.603,71.343 v1(123.605,71.344) ; v1(131.44,70.217) 130.086,68.863 130.086,18.75 130.51,18.326 131.11,18.326 131.534,18.75 131.534,18.758 132.461,19.685
  Bottom Layer w0.254: v1(123.605,71.344) 123.68,71.269 130.389,71.269 v1(131.44,70.217) ; v1@123.757,71.191 cw(c123.944,71.004) 123.944,71.269 ; v1@123.757,71.497 ccw(c124.308,72.047) 124.308,71.269
FPGA_SPI_/SRAMCS: FPGA1.51 IC3.1 | length 54
  Top Layer w0.21: FPGA1.51@118.852,73.844 120.631,73.844 121.661,74.875
  Top Layer w0.254: 121.661,74.875 v1(124.341,74.875) ; v1@127.58,72.881 cw(c127.58,72.359) 127.948,72.728 cw(c128.317,73.097) v1@127.796,73.097 ; v1(127.58,73.097) 128.037,72.639 128.037,69.922 128.621,69.337 v1(128.621,38.578) ; v1@128.468,38.731 ccw(c128.1,39.099) 128.621,39.099 ccw(c129.142,39.099) v1@128.774,38.731 ; v1(132.401,34.798) 133.036,34.163 IC3.1@133.51,34.163
  Bottom Layer w0.254: v1(124.341,74.875) 125.462,74.875 127.24,73.097 v1(127.58,73.097) ; v1@124.494,74.722 cw(c124.862,74.353) 124.862,74.875 cw(c124.862,75.396) v1@124.494,75.027 ; v1(128.621,38.578) v1(132.401,34.798)
FPGA_SPI_CLOCK: FPGA1.40 IC1.2 IC3.6 | length 68
  Top Layer w0.21: FPGA1.40@118.852,68.344 120.073,68.344 121.425,66.992 ; IC1.2@136.637,19.558 136.637,21.331
  Top Layer w0.254: 121.425,66.992 v1(124.76,66.992) ; 136.637,21.331 142.261,26.955 142.261,31.6 142.238,31.623 141.397,31.623 ; v1(137.409,56.612) 142.972,51.049 142.972,33.198 141.397,31.623 ; IC3.6@140.81,31.623 141.397,31.623
  Bottom Layer w0.254: v1(124.76,66.992) 126.015,66.992 131.313,61.694 132.328,61.694 v1(137.409,56.612) ; v1@124.913,66.84 cw(c125.282,66.471) 125.282,66.992 cw(c125.282,67.514) v1@124.913,67.145
FPGA_SPI_DATAIN: FPGA1.41 IC1.3 IC3.5 | length 75.1
  Top Layer w0.21: FPGA1.41@118.852,68.844 120.389,68.844 121.064,68.169 ; IC1.3@135.987,19.558 135.987,23.77
  Top Layer w0.254: 121.064,68.169 123.5,68.169 v1(124.082,68.75) ; 135.987,23.77 141.605,29.388 v1@141.605,30.861 ; IC3.5@140.762,30.353 IC3.5@140.81,30.353 141.351,30.353 ; v1@141.366,30.721 cw(c141.159,30.545) 141.351,30.353 ; v1(141.53,30.861) 141.53,30.532 141.351,30.353 ; v1@141.377,30.708 cw(c140.827,30.158) 141.605,30.158 ccw(c140.827,30.158) v1@141.377,30.708 ; 141.605,30.521 cw(c141.87,30.521) 141.683,30.708 ccw(c141.87,30.521) 141.605,30.521
  Bottom Layer w0.254: v1(124.082,68.75) 125.098,69.766 127.862,69.766 144.801,52.827 144.801,33.624 141.53,30.353 v1(141.53,30.861)
FPGA_SPI_DATAOUT: FPGA1.42 IC1.4 IC3.2 | length 82.1
  Top Layer w0.21: FPGA1.42@118.852,69.344 v1@121.579,69.344 ; 120.707,69.344 cw(c120.707,68.053) v1@121.62,68.966 ; 121.214,69.344 cw(c121.214,68.56) v1@121.769,69.114 ; IC1.4@135.337,19.558 135.337,25.841 v1(135.337,29.089)
  Top Layer w0.254: v1@121.579,69.344 v1(121.788,69.134) ; v1(132.279,32.893) IC3.2@133.51,32.893 ; v1(133.903,27.275) 135.337,25.841
  Bottom Layer w0.254: v1(121.788,69.134) 122.896,68.026 124.465,68.026 125.573,69.134 127.656,69.134 144.115,52.675 144.115,37.867 v1(135.337,29.089) ; v1(132.279,32.893) 132.782,32.893 ; v1@132.435,32.744 cw(c132.782,32.415) 132.782,32.893 ; v1@132.435,33.042 ccw(c132.782,33.372) 132.782,32.893 ; v1(133.903,27.275) 133.903,31.772 132.782,32.893
FPGASRAM_/WP: FPGA1.52 IC3.3 | length 66.8
  Top Layer w0.21: v1(117.191,74.344) FPGA1.52@118.852,74.344 ; v1@117.359,74.176 cw(c117.766,73.769) 117.766,74.344 cw(c117.766,74.919) v1@117.359,74.512
  Top Layer w0.254: v1(124.328,64.435) 124.328,63.368 124.049,63.089 124.049,32.939 v1(125.37,31.618) ; v1(132.461,31.623) IC3.3@133.51,31.623 ; v1@132.614,31.47 cw(c132.982,31.102) 132.982,31.623 cw(c132.982,32.144) v1@132.614,31.776
  Bottom Layer w0.254: v1@117.038,74.191 cw(c116.67,73.822) 117.191,73.822 cw(c117.712,73.822) v1@117.344,74.191 ; v1(117.191,74.344) 117.191,70.312 120.109,67.394 121.877,67.394 124.328,64.943 v1(124.328,64.435) ; v1(125.37,31.618) 132.461,31.618 v1(125.37,31.618)
FULTRASONIC_EDGE: FPGA1.32 Module1.3 | length 122
  Top Layer w0.21: FPGA1.32@115.052,65.044 115.052,64.105 116.22,62.937 ; FPGA1.32@115.097,64.294 ccw(c115.662,64.294) 115.262,63.895
  Top Layer w0.254: 116.22,62.937 116.777,62.937 117.191,62.522 117.791,62.522 118.206,62.937 119.045,62.937 122.373,66.264 125.573,66.264 126.614,67.305 126.614,90.8 122.322,95.093 122.322,102.459 122.881,103.018 v1(122.881,122.957)
  Bottom Layer w0.254: Module1.3@83.959,129.994 83.959,128.104 82.799,126.945 82.799,123.961 85.856,120.904 118.872,120.904 120.925,122.957 v1(122.881,122.957)
FULTRASONIC_TRIGGER: FPGA1.31 Module1.2 | length 101.8
  Top Layer w0.21: FPGA1.31@114.552,65.044 114.552,68.143
  Top Layer w0.254: v1(102.332,81.834) 102.332,80.363 114.552,68.143
  Bottom Layer w0.254: Module1.2@81.419,129.994 80.264,128.839 80.264,118.364 92.451,106.177 92.451,96.947 90.419,94.915 84.775,94.915 83.858,95.832 83.858,95.901 83.612,96.147 82.355,96.147 81.809,95.601 81.809,93.112 87.422,87.498 94.458,87.498 99.157,82.799 99.563,82.799 100.325,82.037 102.129,82.037 v1(102.332,81.834) ; 101.32,82.037 cw(c101.32,80.822) v1@102.179,81.681 ; 101.933,82.037 cw(c101.933,81.435) v1@102.359,81.861